# EAGLE board periph_panel_rev4 (EAGLE 5.06)
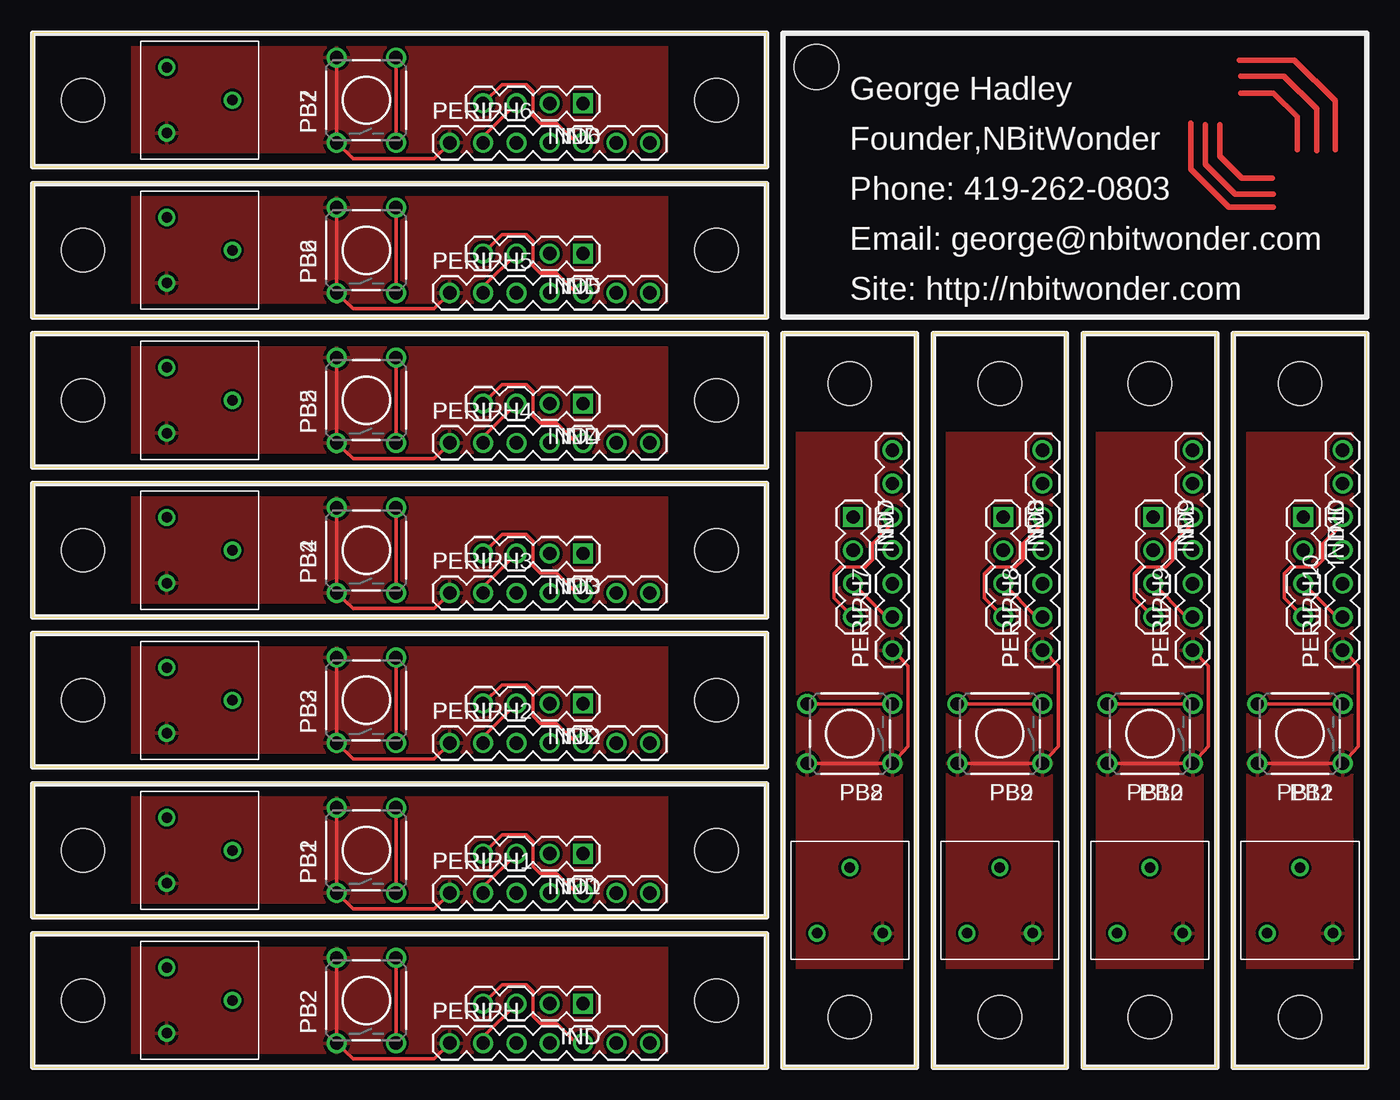
[diagram p0: board, top side]
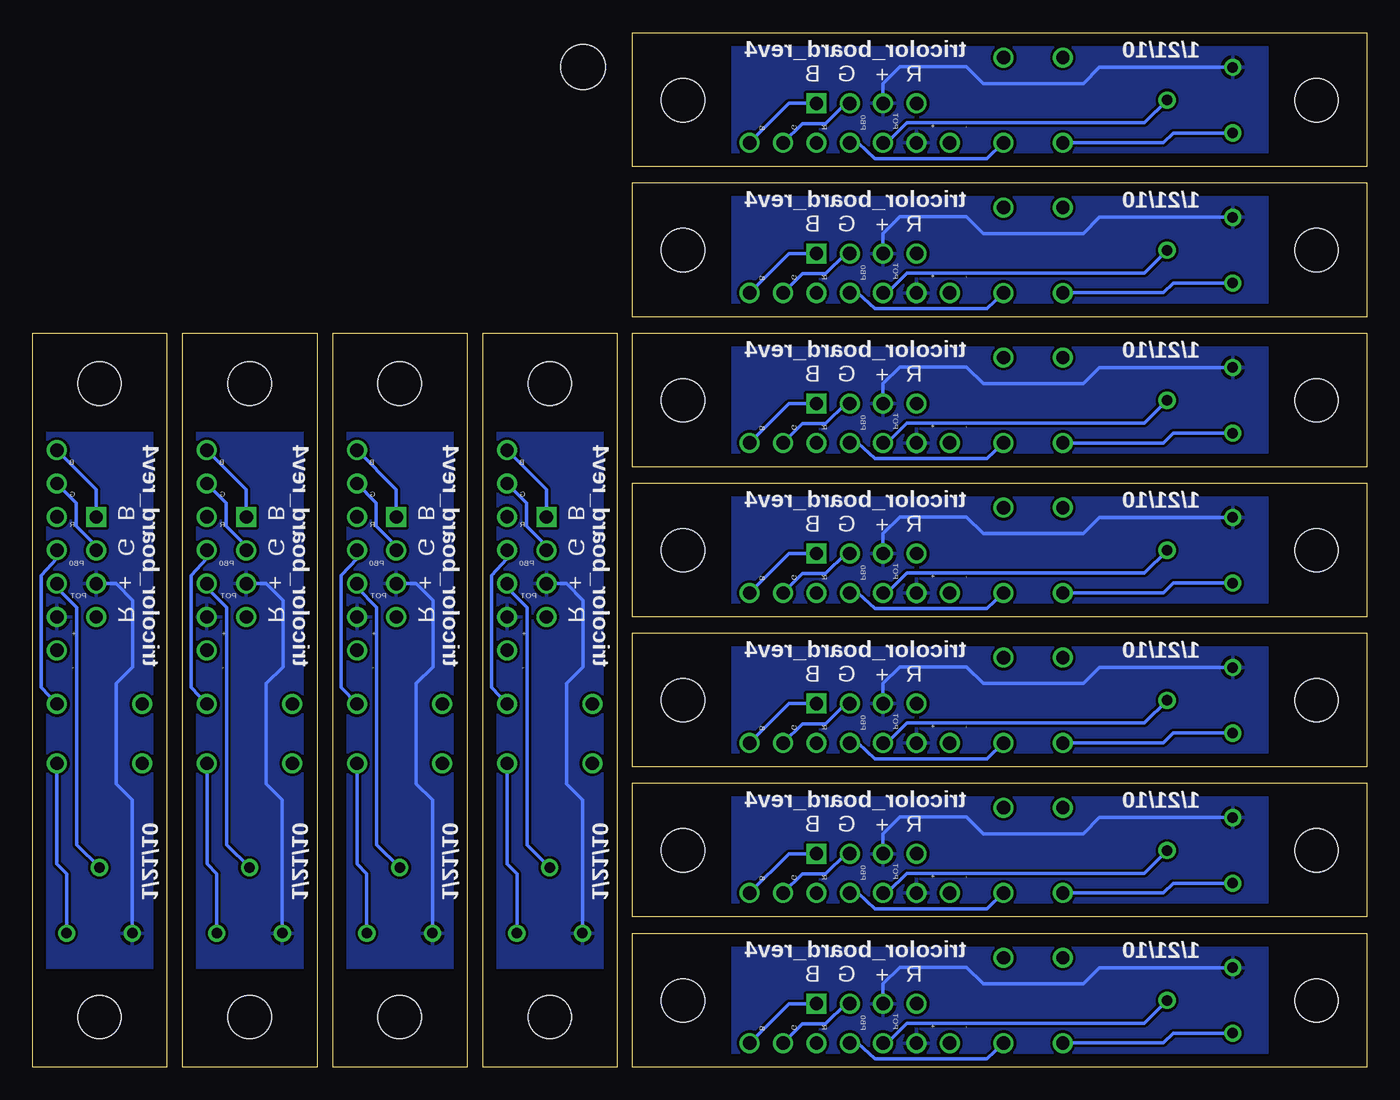
[diagram p1: board, bottom side, seen from below]

Size 101.6 x 78.79 mm. Coordinates in mm from the lower left corner, seen from the top.
Outline: 0,0 55.93,0 55.93,10.21 0,10.21 0,0
Outline: 0,11.43 55.93,11.43 55.93,21.64 0,21.64 0,11.43
Outline: 0,22.86 55.93,22.86 55.93,33.07 0,33.07 0,22.86
Outline: 0,34.29 55.93,34.29 55.93,44.5 0,44.5 0,34.29
Outline: 0,45.72 55.93,45.72 55.93,55.93 0,55.93 0,45.72
Outline: 0,57.15 55.93,57.15 55.93,67.36 0,67.36 0,57.15
Outline: 0,68.58 55.93,68.58 55.93,78.79 0,78.79 0,68.58
Outline: 67.31,0 67.31,55.93 57.1,55.93 57.1,0 67.31,0
Outline: 78.74,0 78.74,55.93 68.53,55.93 68.53,0 78.74,0
Outline: 90.17,0 90.17,55.93 79.96,55.93 79.96,0 90.17,0
Outline: 101.6,0 101.6,55.93 91.39,55.93 91.39,0 101.6,0
Copper layers (1*16): Top 0.035mm / dielectric 1.5mm / Bottom 0.035mm
Design rules "default": minimum track width 10mil, minimum drill 24mil, track to track 8mil, track to pad 8mil, pad to pad 8mil, via to via 8mil, smd to smd 8mil, copper to edge 40mil, drill to drill 8mil, minimum pad ring 10mil, minimum via ring 8mil, stop-mask expansion 4mil, vias tented up to drill 0mil, thermal gap 10mil
Holes 3.43 mm at 59.69,76.2

## Footprints (pad centres in the part's own frame; a part is rotated, then mirrored left to right if it is on the bottom)
1X04 = drill 1.016 square: 1 0,0 | drill 1.016 round: 2 2.54,0; 3 5.08,0; 4 7.62,0
TACTILE-PTH = drill 1.016 round: 1 -3.251,2.261; 2 3.251,2.261; 3 -3.251,-2.261; 4 3.251,-2.261
1X07 = drill 1.016 round: 1 0,0; 2 2.54,0; 3 5.08,0; 4 7.62,0; 5 10.16,0; 6 12.7,0; 7 15.24,0
POT_TRIM = drill 0.8 round: GND 2.5,-2.5; POT -2.5,0; PWR 2.5,2.5
STAND-OFF = hole 3.302: 0,0

## Placement (x,y rotation side)
IND  [1X04]  41.91,4.83 180 top
IND1  [1X04]  41.91,16.26 180 top
IND2  [1X04]  41.91,27.69 180 top
IND3  [1X04]  41.91,39.12 180 top
IND4  [1X04]  41.91,50.55 180 top
IND5  [1X04]  41.91,61.98 180 top
IND6  [1X04]  41.91,73.41 180 top
IND7  [1X04]  62.48,41.91 270 top
IND8  [1X04]  73.91,41.91 270 top
IND9  [1X04]  85.34,41.91 270 top
IND10  [1X04]  96.77,41.91 270 top
PB1  [TACTILE-PTH]  25.4,16.51 90 top
PB2  [TACTILE-PTH]  25.4,5.08 90 top
PB3  [TACTILE-PTH]  25.4,27.94 90 top
PB4  [TACTILE-PTH]  25.4,39.37 90 top
PB5  [TACTILE-PTH]  25.4,50.8 90 top
PB6  [TACTILE-PTH]  25.4,62.23 90 top
PB7  [TACTILE-PTH]  25.4,73.66 90 top
PB8  [TACTILE-PTH]  62.23,25.4 180 top
PB9  [TACTILE-PTH]  73.66,25.4 180 top
PB10  [TACTILE-PTH]  85.09,25.4 180 top
PB11  [TACTILE-PTH]  96.52,25.4 180 top
PERIPH  [1X07]  31.75,1.83 0 top
PERIPH1  [1X07]  31.75,13.26 0 top
PERIPH2  [1X07]  31.75,24.69 0 top
PERIPH3  [1X07]  31.75,36.12 0 top
PERIPH4  [1X07]  31.75,47.55 0 top
PERIPH5  [1X07]  31.75,58.98 0 top
PERIPH6  [1X07]  31.75,70.41 0 top
PERIPH7  [1X07]  65.48,31.75 90 top
PERIPH8  [1X07]  76.91,31.75 90 top
PERIPH9  [1X07]  88.34,31.75 90 top
PERIPH10  [1X07]  99.77,31.75 90 top
U$1  POT_3310  [POT_TRIM]  12.7,5.08 180 top
U$2  [STAND-OFF]  3.81,16.51 90 top
U$3  [STAND-OFF]  52.07,16.51 0 top
U$4  POT_3310  [POT_TRIM]  12.7,16.51 180 top
U$5  [STAND-OFF]  3.81,5.08 90 top
U$6  [STAND-OFF]  52.07,5.08 0 top
U$7  [STAND-OFF]  3.81,27.94 90 top
U$8  [STAND-OFF]  52.07,27.94 0 top
U$9  POT_3310  [POT_TRIM]  12.7,27.94 180 top
U$10  [STAND-OFF]  3.81,39.37 90 top
U$11  [STAND-OFF]  52.07,39.37 0 top
U$12  POT_3310  [POT_TRIM]  12.7,39.37 180 top
U$13  [STAND-OFF]  3.81,50.8 90 top
U$14  [STAND-OFF]  52.07,50.8 0 top
U$15  POT_3310  [POT_TRIM]  12.7,50.8 180 top
U$16  [STAND-OFF]  3.81,62.23 90 top
U$17  [STAND-OFF]  52.07,62.23 0 top
U$18  POT_3310  [POT_TRIM]  12.7,62.23 180 top
U$19  [STAND-OFF]  3.81,73.66 90 top
U$20  [STAND-OFF]  52.07,73.66 0 top
U$21  POT_3310  [POT_TRIM]  12.7,73.66 180 top
U$22  [STAND-OFF]  62.23,3.81 180 top
U$23  [STAND-OFF]  62.23,52.07 90 top
U$24  POT_3310  [POT_TRIM]  62.23,12.7 270 top
U$25  [STAND-OFF]  73.66,3.81 180 top
U$26  [STAND-OFF]  73.66,52.07 90 top
U$27  POT_3310  [POT_TRIM]  73.66,12.7 270 top
U$28  [STAND-OFF]  85.09,3.81 180 top
U$29  [STAND-OFF]  85.09,52.07 90 top
U$30  POT_3310  [POT_TRIM]  85.09,12.7 270 top
U$31  [STAND-OFF]  96.52,3.81 180 top
U$32  [STAND-OFF]  96.52,52.07 90 top
U$33  POT_3310  [POT_TRIM]  96.52,12.7 270 top

## Library data of the parts
IND IND1-IND10 PB1-PB11 PERIPH PERIPH1-PERIPH10 U$2 U$3 U$5-U$8 U$10 U$11 U$13 U$14 U$16 U$17 U$19 U$20 U$22 U$23 U$25 U$26 U$28 U$29 U$31 U$32 = SparkFun
U$1 U$4 U$9 U$12 U$15 U$18 U$21 U$24 U$27 U$30 U$33 = NBitWonder

## Nets
BLUE: IND.1 PERIPH.7
BLUE1: IND1.1 PERIPH1.7
BLUE2: IND2.1 PERIPH2.7
BLUE3: IND3.1 PERIPH3.7
BLUE4: IND4.1 PERIPH4.7
BLUE5: IND5.1 PERIPH5.7
BLUE6: IND6.1 PERIPH6.7
BLUE7: IND7.1 PERIPH7.7
BLUE8: IND8.1 PERIPH8.7
BLUE9: IND9.1 PERIPH9.7
BLUE10: IND10.1 PERIPH10.7
GREEN: IND.2 PERIPH.6
GREEN1: IND1.2 PERIPH1.6
GREEN2: IND2.2 PERIPH2.6
GREEN3: IND3.2 PERIPH3.6
GREEN4: IND4.2 PERIPH4.6
GREEN5: IND5.2 PERIPH5.6
GREEN6: IND6.2 PERIPH6.6
GREEN7: IND7.2 PERIPH7.6
GREEN8: IND8.2 PERIPH8.6
GREEN9: IND9.2 PERIPH9.6
GREEN10: IND10.2 PERIPH10.6
PB_0: PB2.3 PB2.4 PERIPH.4
PB_1: PB1.3 PB1.4 PERIPH1.4
PB_2: PB3.3 PB3.4 PERIPH2.4
PB_3: PB4.3 PB4.4 PERIPH3.4
PB_4: PB5.3 PB5.4 PERIPH4.4
PB_5: PB6.3 PB6.4 PERIPH5.4
PB_6: PB7.3 PB7.4 PERIPH6.4
PB_7: PB8.3 PB8.4 PERIPH7.4
PB_8: PB9.3 PB9.4 PERIPH8.4
PB_9: PB10.3 PB10.4 PERIPH9.4
PB_10: PB11.3 PB11.4 PERIPH10.4
POT: PERIPH.3 U$1.POT
POT1: PERIPH1.3 U$4.POT
POT2: PERIPH2.3 U$9.POT
POT3: PERIPH3.3 U$12.POT
POT4: PERIPH4.3 U$15.POT
POT5: PERIPH5.3 U$18.POT
POT6: PERIPH6.3 U$21.POT
POT7: PERIPH7.3 U$24.POT
POT8: PERIPH8.3 U$27.POT
POT9: PERIPH9.3 U$30.POT
POT10: PERIPH10.3 U$33.POT
PWR: IND.3 PERIPH.2 U$1.GND
PWR1: IND1.3 PERIPH1.2 U$4.GND
PWR2: IND2.3 PERIPH2.2 U$9.GND
PWR3: IND3.3 PERIPH3.2 U$12.GND
PWR4: IND4.3 PERIPH4.2 U$15.GND
PWR5: IND5.3 PERIPH5.2 U$18.GND
PWR6: IND6.3 PERIPH6.2 U$21.GND
PWR7: IND7.3 PERIPH7.2 U$24.GND
PWR8: IND8.3 PERIPH8.2 U$27.GND
PWR9: IND9.3 PERIPH9.2 U$30.GND
PWR10: IND10.3 PERIPH10.2 U$33.GND
RED: IND.4 PERIPH.5
RED1: IND1.4 PERIPH1.5
RED2: IND2.4 PERIPH2.5
RED3: IND3.4 PERIPH3.5
RED4: IND4.4 PERIPH4.5
RED5: IND5.4 PERIPH5.5
RED6: IND6.4 PERIPH6.5
RED7: IND7.4 PERIPH7.5
RED8: IND8.4 PERIPH8.5
RED9: IND9.4 PERIPH9.5
RED10: IND10.4 PERIPH10.5
VSS: PB2.1 PB2.2 PERIPH.1 U$1.PWR
VSS1: PB1.1 PB1.2 PERIPH1.1 U$4.PWR
VSS2: PB3.1 PB3.2 PERIPH2.1 U$9.PWR
VSS3: PB4.1 PB4.2 PERIPH3.1 U$12.PWR
VSS4: PB5.1 PB5.2 PERIPH4.1 U$15.PWR
VSS5: PB6.1 PB6.2 PERIPH5.1 U$18.PWR
VSS6: PB7.1 PB7.2 PERIPH6.1 U$21.PWR
VSS7: PB8.1 PB8.2 PERIPH7.1 U$24.PWR
VSS8: PB9.1 PB9.2 PERIPH8.1 U$27.PWR
VSS9: PB10.1 PB10.2 PERIPH9.1 U$30.PWR
VSS10: PB11.1 PB11.2 PERIPH10.1 U$33.PWR

## Tracks (layer width: path | path; a pad name or v marks a point on that pad's centre or on a via)
BLUE
  Bottom 0.254: IND.1 43.99,4.83 PERIPH.7
BLUE1
  Bottom 0.254: IND1.1 43.99,16.26 PERIPH1.7
BLUE2
  Bottom 0.254: IND2.1 43.99,27.69 PERIPH2.7
BLUE3
  Bottom 0.254: IND3.1 43.99,39.12 PERIPH3.7
BLUE4
  Bottom 0.254: IND4.1 43.99,50.55 PERIPH4.7
BLUE5
  Bottom 0.254: IND5.1 43.99,61.98 PERIPH5.7
BLUE6
  Bottom 0.254: IND6.1 43.99,73.41 PERIPH6.7
BLUE7
  Bottom 0.254: IND7.1 62.48,43.99 PERIPH7.7
BLUE8
  Bottom 0.254: IND8.1 73.91,43.99 PERIPH8.7
BLUE9
  Bottom 0.254: IND9.1 85.34,43.99 PERIPH9.7
BLUE10
  Bottom 0.254: IND10.1 96.77,43.99 PERIPH10.7
GREEN
  Bottom 0.254: IND.2 39.68,4.83 41.21,3.3 42.98,3.3 PERIPH.6
GREEN1
  Bottom 0.254: IND1.2 39.68,16.26 41.21,14.73 42.98,14.73 PERIPH1.6
GREEN2
  Bottom 0.254: IND2.2 39.68,27.69 41.21,26.16 42.98,26.16 PERIPH2.6
GREEN3
  Bottom 0.254: IND3.2 39.68,39.12 41.21,37.59 42.98,37.59 PERIPH3.6
GREEN4
  Bottom 0.254: IND4.2 39.68,50.55 41.21,49.02 42.98,49.02 PERIPH4.6
GREEN5
  Bottom 0.254: IND5.2 39.68,61.98 41.21,60.45 42.98,60.45 PERIPH5.6
GREEN6
  Bottom 0.254: IND6.2 39.68,73.41 41.21,71.88 42.98,71.88 PERIPH6.6
GREEN7
  Bottom 0.254: IND7.2 62.48,39.68 64.01,41.21 64.01,42.98 PERIPH7.6
GREEN8
  Bottom 0.254: IND8.2 73.91,39.68 75.44,41.21 75.44,42.98 PERIPH8.6
GREEN9
  Bottom 0.254: IND9.2 85.34,39.68 86.87,41.21 86.87,42.98 PERIPH9.6
GREEN10
  Bottom 0.254: IND10.2 96.77,39.68 98.3,41.21 98.3,42.98 PERIPH10.6
PB_0
  Top 0.254: PB2.3 PB2.4
  Bottom 0.254: PERIPH.4 38.76,1.83 37.45,0.64 28.92,0.64 PB2.3
PB_1
  Top 0.254: PB1.3 PB1.4
  Bottom 0.254: PERIPH1.4 38.76,13.26 37.45,12.06 28.92,12.06 PB1.3
PB_2
  Top 0.254: PB3.3 PB3.4
  Bottom 0.254: PERIPH2.4 38.76,24.69 37.45,23.5 28.92,23.5 PB3.3
PB_3
  Top 0.254: PB4.3 PB4.4
  Bottom 0.254: PERIPH3.4 38.76,36.12 37.45,34.92 28.92,34.92 PB4.3
PB_4
  Top 0.254: PB5.3 PB5.4
  Bottom 0.254: PERIPH4.4 38.76,47.55 37.45,46.35 28.92,46.35 PB5.3
PB_5
  Top 0.254: PB6.3 PB6.4
  Bottom 0.254: PERIPH5.4 38.76,58.98 37.45,57.78 28.92,57.78 PB6.3
PB_6
  Top 0.254: PB7.3 PB7.4
  Bottom 0.254: PERIPH6.4 38.76,70.41 37.45,69.22 28.92,69.22 PB7.3
PB_7
  Top 0.254: PB8.4 PB8.3
  Bottom 0.254: PERIPH7.4 65.48,38.76 66.67,37.45 66.67,28.92 PB8.3
PB_8
  Top 0.254: PB9.4 PB9.3
  Bottom 0.254: PERIPH8.4 76.91,38.76 78.11,37.45 78.11,28.92 PB9.3
PB_9
  Top 0.254: PB10.4 PB10.3
  Bottom 0.254: PERIPH9.4 88.34,38.76 89.53,37.45 89.53,28.92 PB10.3
PB_10
  Top 0.254: PB11.4 PB11.3
  Bottom 0.254: PERIPH10.4 99.77,38.76 100.97,37.45 100.97,28.92 PB11.3
POT
  Bottom 0.254: PERIPH.3 36.53,1.83 35.02,3.35 16.93,3.35 U$1.POT
POT1
  Bottom 0.254: PERIPH1.3 36.53,13.26 35.02,14.78 16.93,14.78 U$4.POT
POT2
  Bottom 0.254: PERIPH2.3 36.53,24.69 35.02,26.2 16.93,26.2 U$9.POT
POT3
  Bottom 0.254: PERIPH3.3 36.53,36.12 35.02,37.63 16.93,37.63 U$12.POT
POT4
  Bottom 0.254: PERIPH4.3 36.53,47.55 35.02,49.06 16.93,49.06 U$15.POT
POT5
  Bottom 0.254: PERIPH5.3 36.53,58.98 35.02,60.49 16.93,60.49 U$18.POT
POT6
  Bottom 0.254: PERIPH6.3 36.53,70.41 35.02,71.92 16.93,71.92 U$21.POT
POT7
  Bottom 0.254: PERIPH7.3 65.48,36.53 63.97,35.02 63.97,16.93 U$24.POT
POT8
  Bottom 0.254: PERIPH8.3 76.91,36.53 75.39,35.02 75.39,16.93 U$27.POT
POT9
  Bottom 0.254: PERIPH9.3 88.34,36.53 86.83,35.02 86.83,16.93 U$30.POT
POT10
  Bottom 0.254: PERIPH10.3 99.77,36.53 98.25,35.02 98.25,16.93 U$33.POT
PWR
  Top 0.254: PERIPH.2 34.3,2.29 IND.3
  Bottom 0.254: U$1.GND 20.36,7.58 21.59,6.35 29.21,6.35 30.48,7.62 35.56,7.62 36.83,6.35 IND.3
  pour Bottom: 7.62,10.16 7.62,0 48.26,0 48.26,10.16
PWR1
  Top 0.254: PERIPH1.2 34.3,13.72 IND1.3
  Bottom 0.254: U$4.GND 20.36,19.01 21.59,17.78 29.21,17.78 30.48,19.05 35.56,19.05 36.83,17.78 IND1.3
  pour Bottom: 7.62,21.59 7.62,11.43 48.26,11.43 48.26,21.59
PWR2
  Top 0.254: PERIPH2.2 34.3,25.16 IND2.3
  Bottom 0.254: U$9.GND 20.36,30.44 21.59,29.21 29.21,29.21 30.48,30.48 35.56,30.48 36.83,29.21 IND2.3
  pour Bottom: 7.62,33.02 7.62,22.86 48.26,22.86 48.26,33.02
PWR3
  Top 0.254: PERIPH3.2 34.3,36.59 IND3.3
  Bottom 0.254: U$12.GND 20.36,41.87 21.59,40.64 29.21,40.64 30.48,41.91 35.56,41.91 36.83,40.64 IND3.3
  pour Bottom: 7.62,44.45 7.62,34.29 48.26,34.29 48.26,44.45
PWR4
  Top 0.254: PERIPH4.2 34.3,48.02 IND4.3
  Bottom 0.254: U$15.GND 20.36,53.3 21.59,52.07 29.21,52.07 30.48,53.34 35.56,53.34 36.83,52.07 IND4.3
  pour Bottom: 7.62,55.88 7.62,45.72 48.26,45.72 48.26,55.88
PWR5
  Top 0.254: PERIPH5.2 34.3,59.45 IND5.3
  Bottom 0.254: U$18.GND 20.36,64.73 21.59,63.5 29.21,63.5 30.48,64.77 35.56,64.77 36.83,63.5 IND5.3
  pour Bottom: 7.62,67.31 7.62,57.15 48.26,57.15 48.26,67.31
PWR6
  Top 0.254: PERIPH6.2 34.3,70.88 IND6.3
  Bottom 0.254: U$21.GND 20.36,76.16 21.59,74.93 29.21,74.93 30.48,76.2 35.56,76.2 36.83,74.93 IND6.3
  pour Bottom: 7.62,78.74 7.62,68.58 48.26,68.58 48.26,78.74
PWR7
  Top 0.254: PERIPH7.2 65.02,34.3 IND7.3
  Bottom 0.254: U$24.GND 59.73,20.36 60.96,21.59 60.96,29.21 59.69,30.48 59.69,35.56 60.96,36.83 IND7.3
  pour Bottom: 57.15,7.62 67.31,7.62 67.31,48.26 57.15,48.26
PWR8
  Top 0.254: PERIPH8.2 76.44,34.3 IND8.3
  Bottom 0.254: U$27.GND 71.16,20.36 72.39,21.59 72.39,29.21 71.12,30.48 71.12,35.56 72.39,36.83 IND8.3
  pour Bottom: 68.58,7.62 78.74,7.62 78.74,48.26 68.58,48.26
PWR9
  Top 0.254: PERIPH9.2 87.88,34.3 IND9.3
  Bottom 0.254: U$30.GND 82.59,20.36 83.82,21.59 83.82,29.21 82.55,30.48 82.55,35.56 83.82,36.83 IND9.3
  pour Bottom: 80.01,7.62 90.17,7.62 90.17,48.26 80.01,48.26
PWR10
  Top 0.254: PERIPH10.2 99.31,34.3 IND10.3
  Bottom 0.254: U$33.GND 94.02,20.36 95.25,21.59 95.25,29.21 93.98,30.48 93.98,35.56 95.25,36.83 IND10.3
  pour Bottom: 91.44,7.62 101.6,7.62 101.6,48.26 91.44,48.26
RED
  Top 0.254: PERIPH.5 41.41,1.83 39.9,3.34 38.65,3.34 38.11,3.88 38.11,5.78 37.62,6.27 35.73,6.27 IND.4
RED1
  Top 0.254: PERIPH1.5 41.41,13.26 39.9,14.77 38.65,14.77 38.11,15.31 38.11,17.2 37.62,17.7 35.73,17.7 IND1.4
RED2
  Top 0.254: PERIPH2.5 41.41,24.69 39.9,26.2 38.65,26.2 38.11,26.74 38.11,28.64 37.62,29.13 35.73,29.13 IND2.4
RED3
  Top 0.254: PERIPH3.5 41.41,36.12 39.9,37.63 38.65,37.63 38.11,38.17 38.11,40.06 37.62,40.56 35.73,40.56 IND3.4
RED4
  Top 0.254: PERIPH4.5 41.41,47.55 39.9,49.06 38.65,49.06 38.11,49.6 38.11,51.49 37.62,51.99 35.73,51.99 IND4.4
RED5
  Top 0.254: PERIPH5.5 41.41,58.98 39.9,60.49 38.65,60.49 38.11,61.03 38.11,62.92 37.62,63.42 35.73,63.42 IND5.4
RED6
  Top 0.254: PERIPH6.5 41.41,70.41 39.9,71.92 38.65,71.92 38.11,72.46 38.11,74.36 37.62,74.85 35.73,74.85 IND6.4
RED7
  Top 0.254: PERIPH7.5 65.48,41.41 63.97,39.9 63.97,38.65 63.43,38.11 61.53,38.11 61.04,37.62 61.04,35.73 IND7.4
RED8
  Top 0.254: PERIPH8.5 76.91,41.41 75.4,39.9 75.4,38.65 74.86,38.11 72.97,38.11 72.47,37.62 72.47,35.73 IND8.4
RED9
  Top 0.254: PERIPH9.5 88.34,41.41 86.83,39.9 86.83,38.65 86.29,38.11 84.39,38.11 83.9,37.62 83.9,35.73 IND9.4
RED10
  Top 0.254: PERIPH10.5 99.77,41.41 98.26,39.9 98.26,38.65 97.72,38.11 95.83,38.11 95.33,37.62 95.33,35.73 IND10.4
S$1
  Top 0.406: 92,74.2 94.5,74.2 96.3,72.4 96.3,69.9
S$2
  Top 0.406: 97.8,69.8 97.8,73 95.3,75.5 92,75.5
S$3
  Top 0.406: 91.9,76.7 96.1,76.7 99.2,73.6 99.2,69.9
S$4
  Top 0.406: 90.4,71.8 90.4,69.4 92.1,67.7 94.4,67.7
S$5
  Top 0.406: 94.5,66.5 91.6,66.5 89.3,68.8 89.3,71.8
S$6
  Top 0.406: 88.2,71.9 88.2,68.4 91.1,65.5 94.5,65.5
VSS
  Top 0.254: PERIPH.1 31.75,1.76 30.57,0.64 24.41,0.64 PB2.1 PB2.2
  Bottom 0.254: U$1.PWR 14.73,2.58 15.47,1.83 PB2.1
  pour Top: 7.62,10.16 7.62,0 48.26,0 48.26,10.16
VSS1
  Top 0.254: PERIPH1.1 31.75,13.19 30.57,12.06 24.41,12.06 PB1.1 PB1.2
  Bottom 0.254: U$4.PWR 14.73,14.01 15.47,13.27 PB1.1
  pour Top: 7.62,21.59 7.62,11.43 48.26,11.43 48.26,21.59
VSS2
  Top 0.254: PERIPH2.1 31.75,24.62 30.57,23.5 24.41,23.5 PB3.1 PB3.2
  Bottom 0.254: U$9.PWR 14.73,25.44 15.47,24.7 PB3.1
  pour Top: 7.62,33.02 7.62,22.86 48.26,22.86 48.26,33.02
VSS3
  Top 0.254: PERIPH3.1 31.75,36.05 30.57,34.92 24.41,34.92 PB4.1 PB4.2
  Bottom 0.254: U$12.PWR 14.73,36.87 15.47,36.12 PB4.1
  pour Top: 7.62,44.45 7.62,34.29 48.26,34.29 48.26,44.45
VSS4
  Top 0.254: PERIPH4.1 31.75,47.48 30.57,46.35 24.41,46.35 PB5.1 PB5.2
  Bottom 0.254: U$15.PWR 14.73,48.3 15.47,47.55 PB5.1
  pour Top: 7.62,55.88 7.62,45.72 48.26,45.72 48.26,55.88
VSS5
  Top 0.254: PERIPH5.1 31.75,58.91 30.57,57.78 24.41,57.78 PB6.1 PB6.2
  Bottom 0.254: U$18.PWR 14.73,59.73 15.47,58.98 PB6.1
  pour Top: 7.62,67.31 7.62,57.15 48.26,57.15 48.26,67.31
VSS6
  Top 0.254: PERIPH6.1 31.75,70.34 30.57,69.22 24.41,69.22 PB7.1 PB7.2
  Bottom 0.254: U$21.PWR 14.73,71.16 15.47,70.42 PB7.1
  pour Top: 7.62,78.74 7.62,68.58 48.26,68.58 48.26,78.74
VSS7
  Top 0.254: PERIPH7.1 65.55,31.75 66.67,30.57 66.67,24.41 PB8.1 PB8.2
  Bottom 0.254: U$24.PWR 64.73,14.73 65.47,15.47 PB8.1
  pour Top: 57.15,7.62 67.31,7.62 67.31,48.26 57.15,48.26
VSS8
  Top 0.254: PERIPH8.1 76.98,31.75 78.11,30.57 78.11,24.41 PB9.1 PB9.2
  Bottom 0.254: U$27.PWR 76.16,14.73 76.91,15.47 PB9.1
  pour Top: 68.58,7.62 78.74,7.62 78.74,48.26 68.58,48.26
VSS9
  Top 0.254: PERIPH9.1 88.41,31.75 89.53,30.57 89.53,24.41 PB10.1 PB10.2
  Bottom 0.254: U$30.PWR 87.59,14.73 88.33,15.47 PB10.1
  pour Top: 80.01,7.62 90.17,7.62 90.17,48.26 80.01,48.26
VSS10
  Top 0.254: PERIPH10.1 99.84,31.75 100.97,30.57 100.97,24.41 PB11.1 PB11.2
  Bottom 0.254: U$33.PWR 99.02,14.73 99.77,15.47 PB11.1
  pour Top: 91.44,7.62 101.6,7.62 101.6,48.26 91.44,48.26

## Text on the board
Pads: N | B | W
tPlace: George Hadley | Founder,NBitWonder | Phone: 419-262-0803 | Email: george@nbitwonder.com | Site: http://nbitwonder.com
bPlace: 1/21/10 | tricolor_board_rev4 | R | + | G | B | - | + | POT | PB0 | R | G | B | tricolor_board_rev4 | 1/21/10 | R | + | G | B | - | + | POT | PB0 | R | G | B | 1/21/10 | tricolor_board_rev4 | R | + | G | B | - | + | POT | PB0 | R | G | B | B | B | B | B | G | G | G | G | 1/21/10 | tricolor_board_rev4 | B | R | B | R | B | R | B | R | R | + | G | B | G | PB0 | G | PB0 | G | PB0 | G | PB0 | - | + | POT | PB0 | R | G | B | + | POT | + | POT | + | POT | + | POT | R | R | R | R | + | + | + | + | 1/21/10 | tricolor_board_rev4 | - | - | - | - | tricolor_board_rev4 | tricolor_board_rev4 | tricolor_board_rev4 | tricolor_board_rev4 | R | + | G | B | - | + | POT | PB0 | R | G | B | 1/21/10 | tricolor_board_rev4 | R | + | G | B | - | + | POT | PB0 | R | G | B | 1/21/10 | 1/21/10 | 1/21/10 | 1/21/10 | 1/21/10 | tricolor_board_rev4 | R | + | G | B | - | + | POT | PB0 | R | G | B
_tNames: PERIPH | PERIPH | IND | IND | PB2 | PB2 | PERIPH | PERIPH | PB2 | PB2 | IND | IND | PERIPH | PERIPH | IND | IND | PB2 | PB2 | IND | IND | IND | IND | IND | IND | IND | IND | PERIPH | PERIPH | PB2 | PB2 | IND | IND | PERIPH | PERIPH | PERIPH | PERIPH | PERIPH | PERIPH | PERIPH | PERIPH | PERIPH | PERIPH | IND | IND | PB2 | PB2 | PB2 | PB2 | PB2 | PB2 | PB2 | PB2 | PB2 | PB2 | PERIPH | PERIPH | PB2 | PB2 | IND | IND | PERIPH | PERIPH | PB2 | PB2 | IND | IND